# Altium PCB PCB1.PcbDoc
Units mil, origin at the board's own origin, x right, y up, seen from the top; angles counter-clockwise.
Board outline 3085 x 2635 mil, 2 copper layers (Top Layer, Bottom Layer); 70 components, 61 nets, 265 pads, 79 vias.
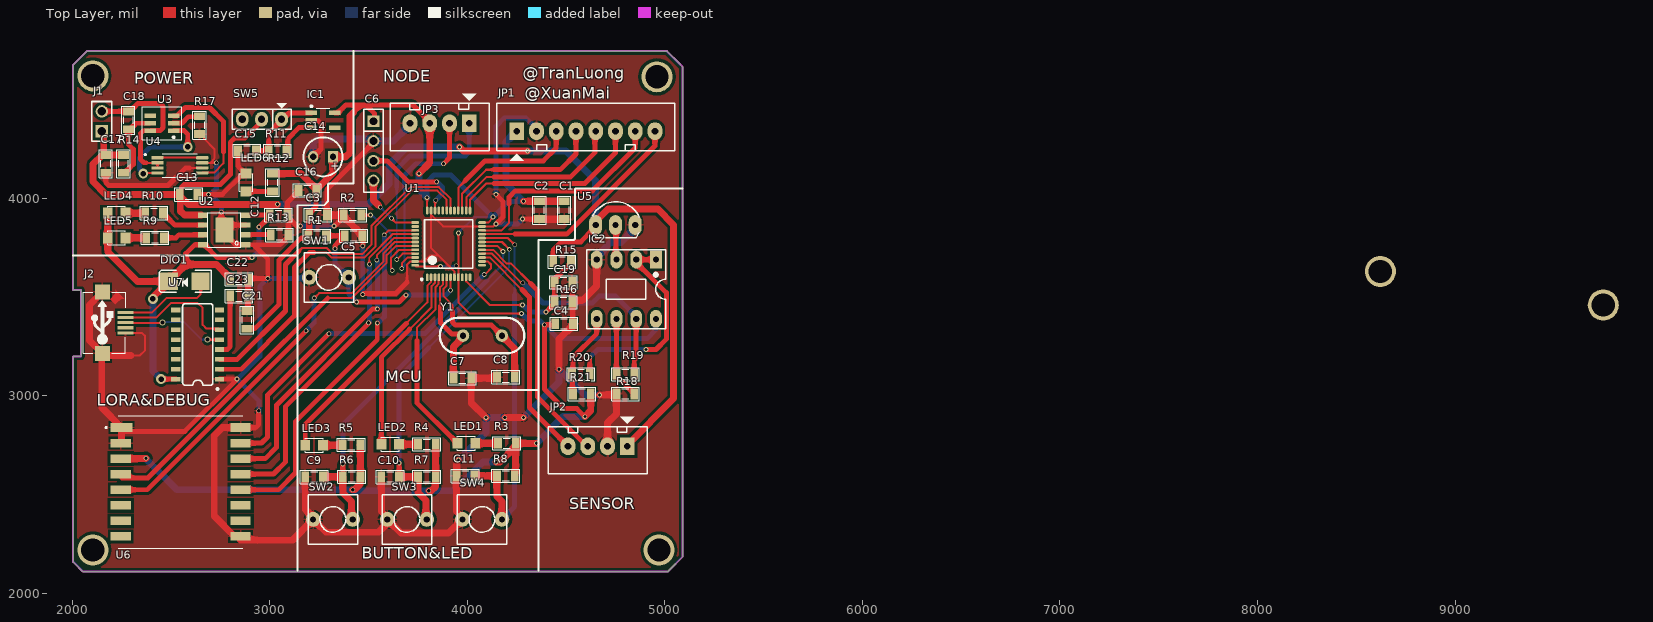
[diagram p0: Top Layer view]
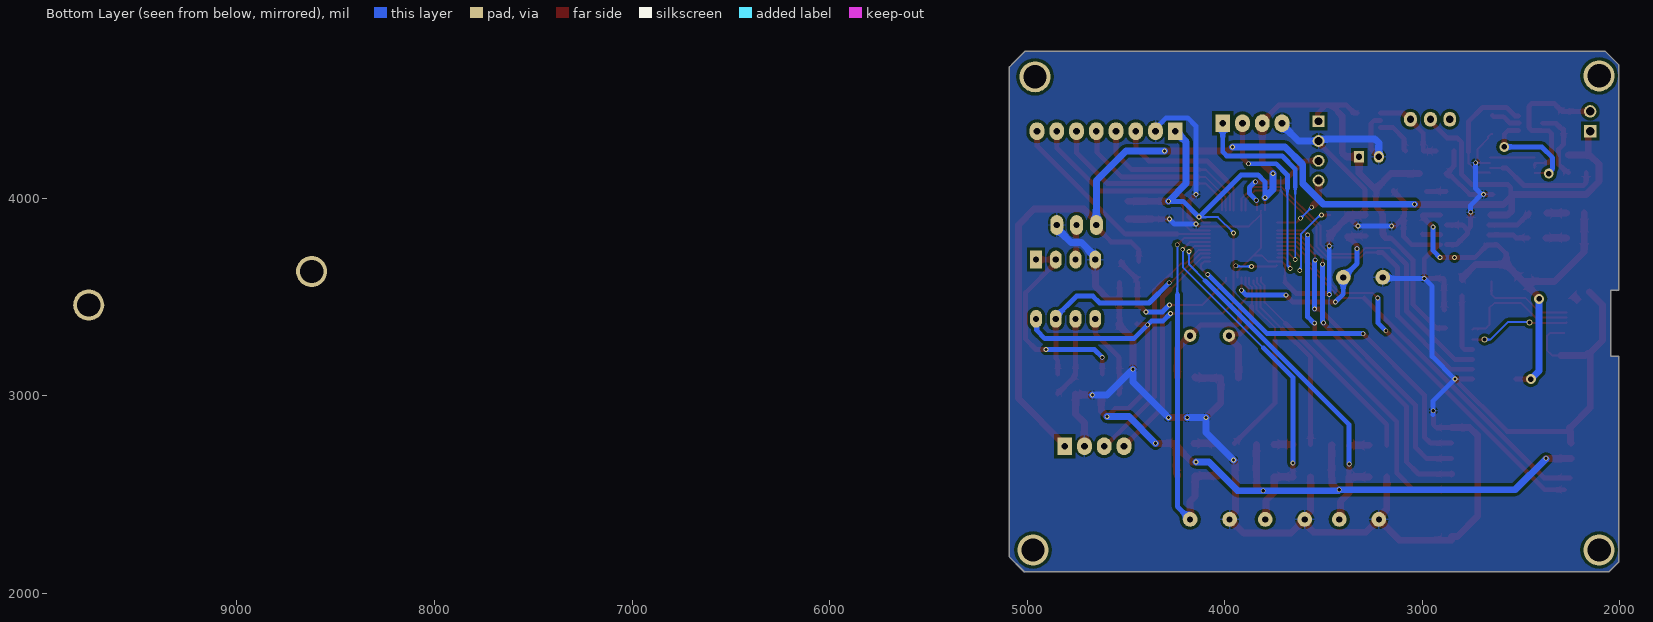
[diagram p1: Bottom Layer view, seen from below]
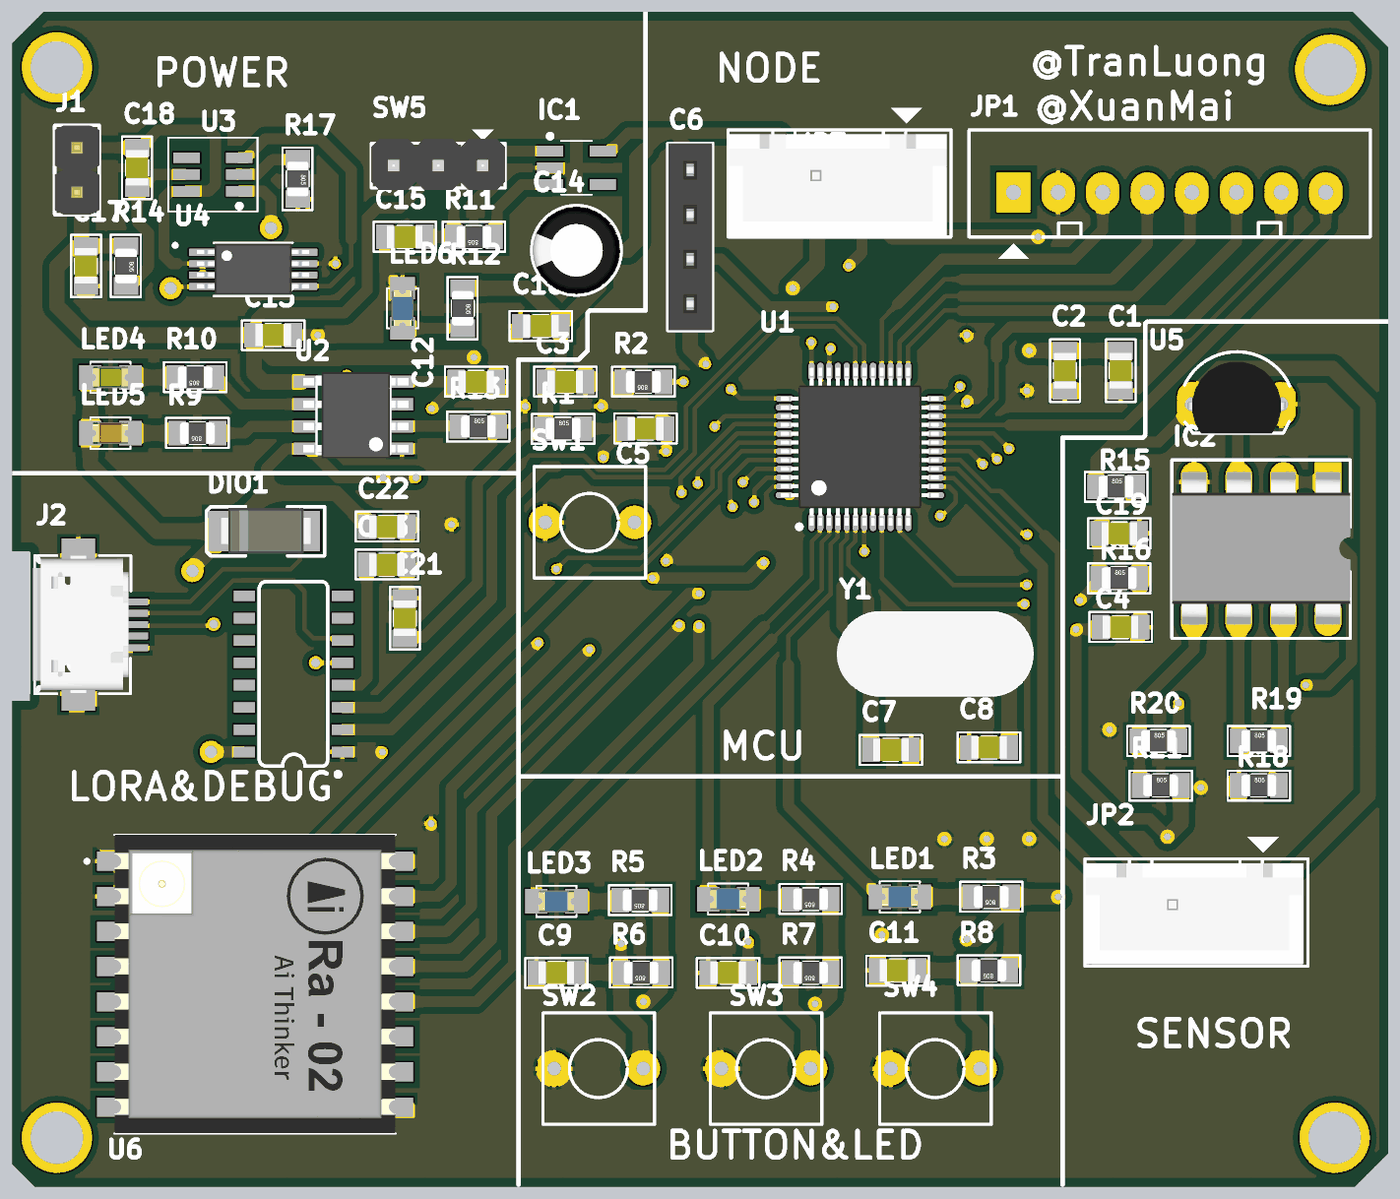
[diagram p2: 3D render of the assembled board from above, using the file's embedded part models]

## Layer stack, top to bottom
Top Solder: solder mask 0.4, Solder Resist, Dk 3.5
Top Layer: signal copper 1.4
Dielectric 1: dielectric 12.6, FR-4, Dk 4.8
Bottom Layer: signal copper 1.4
Bottom Solder: solder mask 0.4, Solder Resist, Dk 3.5

## Board outline
2005,2160 2005,3200 2045,3200 2045,3535 2005,3535 2005,4675 2075,4745 5010,4745 5070,4685 5090,4665 5090,2185 5025,2120 5015,2110 2055,2110

## Design rules (kind name [scope] priority, off if disabled: settings)
Clearance [All] p1: gap=15 ignorepadtopadclearanceinfootprint=FALSE except(0: Arc-Hole Track-Hole SMDPad-Hole THPad-Hole Via-Hole Fill-Hole Poly-Hole Region-Hole Text-Hole; 7: Arc-Arc Arc-Track Arc-SMDPad Track-Track Track-SMDPad SMDPad-SMDPad; 10: Arc-THPad Arc-Via Arc-Text Track-THPad Track-Via Track-Text SMDPad-THPad SMDPad-Via SMDPad-Text THPad-THPad THPad-Via THPad-Text Via-Via Via-Text Fill-Text Poly-Text Region-Text Text-Text)
PolygonConnect [All] p1: connectstyle=Relief reliefconductorwidth=10 reliefentries=4 polygonreliefangle="90 Angle" airgapwidth=10
RoutingVias RoutingVias_1 [All] p1: holewidth=16 width=24 viastyle="Through Hole" minholewidth=16 minwidth=24 maxholewidth=20 maxwidth=28
SolderMaskExpansion [All] p1: expansion=4 istentingtop=FALSE
Width [All] p1: maxlimit=35 minlimit=10 preferedwidth=25
30 further rules are at their usual default settings.

## Classes and differential pairs
component class SENSOR: IC2 JP2 R18 R19 R20 R21 U5
component class POWER: C12 C13 C14 C15 C16 C17 C18 C19 IC1 J1 LED4 LED5 LED6 R9 R10 R11 R12 R13 R14 R15 R16 R17 U2 U3 U4
component class MCU: C1 C2 C3 C4 C5 C6 C7 C8 C9 C10 C11 JP1 LED1 LED2 LED3 R1 R2 R3 R4 R5 R6 R7 R8 SW1 SW2 SW3 SW4 U1 Y1
component class LORA: C21 C22 C23 DIO1 J2 U6 U7
component class LCD: JP3

## Components (designator, comment, footprint, x,y, rotation, side; value= is the part's Value field where it differs from the comment)
C1 "100nF" CAP_0805 4490,3940 r90 top value=33p
C2 "100nF" CAP_0805 4365,3940 r90 top value=33p
C3 "100nF" CAP_0805 3245,3915 r180 top value=33p
C4 "100nF" CAP_0805 4490,3365 r180 top value=33p
C5 "10uF" CAP_0805 3425,3810 r180 top value=33p
C6 "JP4" JP4-C1T 3525,4390 r270 top
C7 "33pF" CAP_0805 3975,3090 r0 top value=33p
C8 "33pF" CAP_0805 4195,3095 r180 top value=33p
C9 "10uF" CAP_0805 3225,2590 r0 top value=33p
C10 "10uF" CAP_0805 3610,2590 r0 top value=33p
C11 "10uF" CAP_0805 3990,2595 r0 top value=33p
C12 "100nF" CAP_0805 3045,3915 r180 top value=33p
C13 "104" CAP_0805 2590,4020 r0 top value=33p
C14 "220uF" c5mm 3270,4210 r180 top
C15 "470nF" CAP_0805 2885,4240 r180 top value=33p
C16 "100nF" CAP_0805 3190,4040 r180 top value=33p
C17 "10uF" CAP_0805 2170,4175 r90 top value=33p
C18 "0.1uF" CAP_0805 2285,4395 r270 top value=33p
C19 "100nF" CAP_0805 4487,3575 r180 top value=33p
C21 "10uF" CAP_0805 2885,3385 r90 top value=33p
C22 "10uF" CAP_0805 2845,3590 r180 top value=33p
C23 "100nF" CAP_0805 2845,3505 r180 top value=33p
DIO1 "Diode SMD" DIO-SMD-106 2570,3580 r0 top value=1N5007
IC1 "RT9013" SOT23-5 3270,4395 r0 top
IC2 "LM358" DIP8/W0.3 4955,3690 r180 top
J1 "JP2" JP2-D1T 2150,4340 r90 top
J2 "USB-5" USB-M1 2270,3370.59 r90 top
JP1 "JP8" CON8 4250,4340 r0 top value="Connector 8"
JP2 "JP4" CON4 4810,2745 r180 top value="Connector 4"
JP3 "JP4" CON4 4010,4380 r180 top value="Connector 4"
LED1 "LED" LED-0805-Blue 4040,2760 r180 top value="LED 3 ly Single Colour"
LED2 "LED" LED-0805-Blue 3655,2755 r180 top value="LED 3 ly Single Colour"
LED3 "LED" LED-0805-Blue 3270,2750 r180 top value="LED 3 ly Single Colour"
LED4 "LED" LED-0805-Green 2180,3925 r0 top value="LED 3 ly Single Colour"
LED5 "LED" LED-0805-Red 2180,3800 r0 top value="LED 3 ly Single Colour"
LED6 "LED" LED-0805-Blue 2880,4035 r90 top value="LED 3 ly Single Colour"
R1 "10K" RES-SMD-0805 3240,3810 r0 top
R2 "100K" RES_SMD_0805 3420,3915 r180 top
R3 "1K" RES_SMD_0805 4200,2760 r180 top
R4 "1K" RES_SMD_0805 3795,2755 r180 top
R5 "1K" RES_SMD_0805 3412.82,2752.5 r180 top
R6 "10K" RES-SMD-0805 3415,2590 r180 top
R7 "10K" RES-SMD-0805 3795,2590 r180 top
R8 "10K" RES-SMD-0805 4195,2595 r180 top
R9 "1k" RES_SMD_0805 2420,3800 r180 top
R10 "1k" RES_SMD_0805 2415,3925 r180 top
R11 "10k" RES_SMD_0805 3040,4240 r180 top
R12 "1K" RES-SMD-0805 3015,4080 r270 top
R13 "1.2k" RES_SMD_0805 3050,3815 r0 top
R14 "100" RES_SMD_0805 2260,4175 r270 top
R15 "30k" RES_SMD_0805 4480,3680 r0 top
R16 "100k" RES_SMD_0805 4487,3475 r0 top
R17 "1K" RES_SMD_0805 2645,4370 r270 top
R18 "Resistor - SMD" RES_SMD_0805 4800,3010 r0 top
R19 "Resistor - SMD" RES_SMD_0805 4800,3110 r0 top
R20 "Resistor - SMD" RES_SMD_0805 4575,3110 r0 top
R21 "Resistor - SMD" RES_SMD_0805 4580,3010 r0 top
SW1 "SW" SW2 3200,3600 r0 top value="SW chip 2 pin"
SW2 "SW" SW2 3220,2375 r0 top value="SW chip 2 pin"
SW3 "SW" SW2 3595,2375 r0 top value="SW chip 2 pin"
SW4 "SW" SW2 3975,2375 r0 top value="SW chip 2 pin"
SW5 "SW3" JP3 2960,4400 r180 top
U1 "STM32" "LQFP 48" 3905.47,3769.13 r90 top
U2 "TP4056" TP4056 2770,3840 r180 top
U3 "DW01A" SOT23-6 2455,4380 r180 top
U4 "FS8205A" FS8205A 2545,4165 r0 top
U5 "LM35" QTO-92 4750,3865 r0 top
U6 "Ra-02 LoRa" Ra-02 2549.27,2564.41 r0 top
U7 "CH340C" SOP-16 2635.24,3260 r90 top
Y1 "8Mhz" XTAL 4075,3305 r180 top

## Footprints (in the part's own frame and the unit in brackets; to place one, negate y for a bottom-side part, rotate by r counter-clockwise, add the part's x,y. Pads: shape width x height; smd on the part's side, far side on the other; paste and mask are expansions set on the pad)
c5mm [mm]
  rect 1.3x1.5 hole 0.8: 1(-1.27,0)
  oval 1.3x1.5 hole 0.8: 2(1.27,0)
  silkscreen extent -2.51,-2.51 2.51,2.51, body extent -2.5,-2.5 2.49,2.5, height 11.01
CAP_0805 [mil]
  rect 39.37x55 smd: 1(-45,0) 2(45,0)
  silkscreen extent -70,-34 70,33, body extent -40,-25 40,25, height 24
CON4 [mil] "CON4"
  rect 75x90 hole 34: 1(0,0)
  oval 75x90 hole 34: 2(100,0) 3(200,0) 4(300,0)
  silkscreen extent -100,-150 400,140, body extent -90,-90 398,136, height 276
CON8 [mil] "CON8"
  rect 75x90 hole 34: 1(0,0)
  oval 75x90 hole 34: 2(100,0) 3(200,0) 4(300,0) 5(400,0) 6(500,0) 7(600,0) 8(700,0)
  silkscreen extent -100,-150 800,140
DIO-SMD-106 [mil]
  rect 90x90.55 smd: 1(80,0) 2(-80,0)
  silkscreen extent -130,-55 135,55, body extent -99,-50 106,52, height 95
DIP8/W0.3 [mil] "8 PIN, W 300mil, Pin to pin 100mil"
  rect 60x90 hole 31: 1(0,0)
  oval 60x90 hole 31: 2(100,0) 3(200,0) 4(300,0) 5(300,300) 6(200,300) 7(100,300) 8(0,300)
  silkscreen extent -50,-50 350,350, body extent -50,-40 350,336, height 201
FS8205A [mm]
  rrect25% 1.56x0.4 smd: 1(-2.88,1.031) 2(-2.88,0.381) 3(-2.88,-0.269) 4(-2.88,-0.919) 5(2.88,-0.919) 6(2.88,-0.269) 7(2.88,0.381) 8(2.88,1.031)
  silkscreen extent -4.54,-1.46 2.25,1.57, body extent -3.2,-1.4 3.2,1.53, height 1.2
JP2-D1T [mm] "2 pins, 1 row, straight, gold plating"
  rect 1.6x1.6 hole 1.1: 1(0,0)
  round 1.6 hole 1.1: 2(2.54,0)
  silkscreen extent -1.27,-1.27 3.81,1.27, body extent -1.27,-1.27 3.81,1.27, height 8.54
JP3 [mil] "Jumper 3"
  oval 65x75 hole 36: 1(-100,0) 2(1,0) 3(99,0)
  silkscreen extent -150,-81 150,50, body extent -150,-60 150,55, height 355
JP4-C1T [mm] "4 row, straight, gold plating"
  rect 1.52x1.52 hole 1.02: 1(0,0)
  round 1.52 hole 1.02: 2(2.54,0) 3(5.08,0) 4(7.62,0)
  silkscreen extent -1.52,-1.27 9.14,1.27, body extent -1.52,-1.25 9.14,1.25, height 8.51
LED-0805-Blue [mil]
  rect 50x55 smd: 1(0,0) 2(90,0)
  silkscreen extent 0,-35 90,35, body extent 5,-25 85,25, height 43
LED-0805-Green [mil]
  rect 50x55 smd: 1(0,0) 2(90,0)
  silkscreen extent 0,-35 90,35, body extent 5,-25 85,25, height 43
LED-0805-Red [mil]
  rect 50x55 smd: 1(0,0) 2(90,0)
  silkscreen extent 0,-35 90,35, body extent 5,-25 85,25, height 43
"LQFP 48" [mm] "LQFP, 48-Leads, Body 7,00x7,00mm, Pitch 0,50mm, IPC Medium Density"
  oval 1x0.35 smd: 1(-4.296,2.75) 2(-4.296,2.25) 3(-4.296,1.75) 4(-4.296,1.25) 5(-4.296,0.75) 6(-4.296,0.25) 7(-4.296,-0.25) 8(-4.296,-0.75) 9(-4.296,-1.25) 10(-4.296,-1.75) 11(-4.296,-2.25) 12(-4.296,-2.75) 25(4.296,-2.75) 26(4.296,-2.25) 27(4.296,-1.75) 28(4.296,-1.25) 29(4.296,-0.75) 30(4.296,-0.25) 31(4.296,0.25) 32(4.296,0.75) 33(4.296,1.25) 34(4.296,1.75) 35(4.296,2.25) 36(4.296,2.75)
  oval 0.35x1 smd: 13(-2.75,-4.296) 14(-2.25,-4.296) 15(-1.75,-4.296) 16(-1.25,-4.296) 17(-0.75,-4.296) 18(-0.25,-4.296) 19(0.25,-4.296) 20(0.75,-4.296) 21(1.25,-4.296) 22(1.75,-4.296) 23(2.25,-4.296) 24(2.75,-4.296) 37(2.75,4.296) 38(2.25,4.296) 39(1.75,4.296) 40(1.25,4.296) 41(0.75,4.296) 42(0.25,4.296) 43(-0.25,4.296) 44(-0.75,4.296) 45(-1.25,4.296) 46(-1.75,4.296) 47(-2.25,4.296) 48(-2.75,4.296)
  silkscreen extent -4.67,-3.1 3.1,3.57, body extent -4.5,-4.5 4.5,4.5, height 1.6
QTO-92 [mil] "TO-92"
  oval 66x100 hole 32: 1(-100,0) 2(0,0) 3(100,0)
  silkscreen extent -117,-65 120,118, body extent -109,-66 109,95, height 245
Ra-02 [mm]
  rect 2.8x1.1 smd: 1(-7.6,7)
  rect 2.6x1.1 smd: 2(-7.7,5) 3(-7.7,3) 4(-7.7,1) 5(-7.7,-1) 6(-7.7,-3) 7(-7.7,-5) 8(-7.7,-7) 9(7.7,-7) 10(7.7,-5) 11(7.7,-3) 12(7.7,-1) 13(7.7,1) 14(7.7,3) 15(7.7,5) 16(7.7,7)
  silkscreen extent -9.68,-8.5 8,8.5, body extent -8,-8.49 8,8.51, height 3.03
RES-SMD-0805 [mil]
  rect 39.37x55 smd: 1(-45,0) 2(45,0)
  silkscreen extent -70,-34 70,33, body extent -39,-25 39,25, height 31
RES_SMD_0805 [mil]
  rect 39.37x55 smd: 1(-45,0) 2(45,0)
  silkscreen extent -70,-34 70,33, body extent -39,-25 39,25, height 31
SOP-16 [mm]
  rect 0.6x1.2 smd: 1(-4.445,-2.8) 2(-3.175,-2.8) 3(-1.905,-2.8) 4(-0.635,-2.8) 5(0.635,-2.8) 6(1.905,-2.8) 7(3.175,-2.8) 8(4.445,-2.8) 9(4.445,2.8) 10(3.175,2.8) 11(1.905,2.8) 12(0.635,2.8) 13(-0.635,2.8) 14(-1.905,2.8) 15(-3.175,2.8) 16(-4.445,2.8)
  silkscreen extent -5.84,-2.67 5.26,1.95, body extent -4.95,-3.47 4.95,3.47, height 1.75
SOT23-5 [mm] "SOT23, 5-Leads, Body 3.0x3.0mm (max), Pitch 0.95mm, IPC Medium Density"
  rect 1.5x0.6 smd: 1(-1.5,0.95) 2(-1.5,0) 3(-1.5,-0.95) 4(1.5,-0.95) 5(1.5,0.95)
  silkscreen extent -1.62,-1.52 0.87,1.92, body extent -1.75,-1.52 1.75,1.53, height 1.45
SOT23-6 [mm] "SOT23, 5-Leads, Body 3.0x3.0mm (max), Pitch 0.95mm, IPC Medium Density"
  rect 1.5x0.6 smd: 1(-1.5,0.95) 2(-1.5,0) 3(-1.5,-0.95) 4(1.5,-0.95) 5(1.5,0) 6(1.5,0.95)
  silkscreen extent -2.54,-2.11 2.54,2.11, body extent -1.75,-1.52 1.75,1.53, height 1.45
SW2 [mil] "SW button 2pin, 250x 250 mil"
  round 75 hole 31: 1(0,0) 2(200,0)
  silkscreen extent -25,-125 225,125
TP4056 [mm]
  rect 1.3x0.7 smd: 1(-2.75,1.905) 2(-2.75,0.635) 3(-2.75,-0.635) 4(-2.75,-1.905) 5(2.75,-1.905) 6(2.75,-0.635) 7(2.75,0.635) 8(2.75,1.905)
  rect 2.3x3.2 smd: 3(-0.025,0)
  silkscreen extent -2.1,-2.2 2.1,2.2, body extent -3.13,-2.45 2.87,2.45, height 1.75
USB-M1 [mm]
  rect 0.4x2 smd: 1(1.3,0) 2(0.65,0) 3(0,0) 4(-0.65,0) 5(-1.321,0)
  rect 1.9x1.9 smd: 5(-3.95,2.968) 5(3.95,2.968)
  silkscreen extent -3.94,-0.03 3.94,5.46, body extent -3.98,0.11 4,5.54, height 2.71
XTAL [mm]
  round 1.6 hole 0.8: 1(-2.552,0.001) 2(2.448,0.001)
  silkscreen extent -5.44,-2.29 5.44,2.29, body extent -5.55,-2.32 5.62,2.35, height 3.63

## Part data
C1 C2 C3 C4 C5 C7 C8 C9 C10 C11 C12 C13 C15 C16 C17 C18 C19 C21 C22 C23: library part CapSMD, "Capacitor", LatestRevisionDate=17-Jul-2002, LatestRevisionNote="Re-released for DXP Platform.", PackageReference=RAD-0.3, Published=8-Jun-2000, Publisher="Altium Limited"
C6: "WR-PHD 2.54 mm Angled Socket Header", Manufacturer="W¨¹rth Elektronik eiSos GmbH", partNo=613004143121, ComponentLink1 Description=Manufacturer, ComponentLink1URL=http://www.we-online.com, ComponentLink2 Description=Datasheet, ComponentLink2URL=http://katalog.we-online.de/em/datasheet/6130xx143121.pdf, Created by="Karrer Zheng", Created Date="29 March 2013", NoPins=04
C14: library part "Cap Pol", "Polarized Capacitor (Axial)", LatestRevisionDate=17-Jul-2002, LatestRevisionNote="Re-released for DXP Platform.", PackageReference=POLAR0.8, Published=8-Jun-2000, Publisher="Altium Limited"
DIO1: "Default Diode", Code - JEDEC=DO-214-AB, Published=8-Jun-2000, Publisher="Altium Limited", Revision="July-2002: Re-released for DXP Platform."
IC1: "RT9013-33GB IC REG LINEAR 3.3V 500mA SOT23-5"
IC2: "Low-Power Dual Operational Amplifier"
J1: "WR-PHD 2.54 mm Angled Socket Header", Manufacturer="W¨¹rth Elektronik eiSos GmbH", partNo=613002143121, ComponentLink1 Description=Manufacturer, ComponentLink1URL=http://www.we-online.com, ComponentLink2 Description=Datasheet, ComponentLink2URL=http://katalog.we-online.de/em/datasheet/6130xx143121.pdf, Created by="Karrer Zheng", Created Date="29 March 2013", NoPins=02
J2: Manufacturer=FCI, Manufacturer Part Number=10118193-0001LF, Supplier Part Number 1=609-4616-1-ND, .Checked PCB=RF, .Checked SCH=MM, .Creator=MM, Category="Connectors, Interconnects", ComponentLink1Description=http://portal.fciconnect.com/Comergent//fci/drawing/10118193.pdf, ComponentLink1URL=http://portal.fciconnect.com/Comergent//fci/drawing/10118193.pdf, Connector Type="USB - micro B", Features="Shielded, Solder Retention", Gender=Receptacle, Ingress Protection=-, Mounting Type="Surface Mount, Right Angle, Horizontal", Number of Contacts=5, Packaging="Cut Tape (CT)", Pricing 1="1=0.46, 10=0.433, 25=0.3712, 50=0.3156, 100=0.3032, 250=0.27224, 500=0.25988 (USD)", RoHS="RoHS Compliant", Specifications="USB 2.0", Stock 1=28642, Supplier 1=Digi-Key
JP1: library part Con8, "Connector 8"
JP2 JP3: library part Con4, "Connector 4"
LED1 LED2 LED3 LED4 LED5 LED6: "LED Single colour Green and Red"
R1 R2 R3 R4 R5 R6 R7 R8 R9 R10 R12 R13 R14 R17: library part "Resistor - SMD", "Resistor SMD", Manufacturer="Generic Components", Class=Passive, Published=08/06/2000, Publisher="Altium Hobart Technology Centre"
R11 R15 R16: library part "Resistor - SMD", "Resistor", Manufacturer="Generic Components", Class=Passive, Published=08/06/2000, Publisher="Altium Hobart Technology Centre"
R18 R19 R20 R21: "Resistor SMD", Manufacturer="Generic Components", Class=Passive, Published=08/06/2000, Publisher="Altium Hobart Technology Centre"
SW1 SW2 SW3 SW4: library part SW2, "Switch button 2 pin"
U1: library part STM32F103C8T6, "STM32 ARM-based 32-bit MCU with 64 Kbytes Flash, 64-pin LQFP, Industrial Temperature"
U2: "Complete single cell Li-Ion battery with a constant current / constant voltage linear charger"
U3: "One Cell Lithium-ion/Polymer Battery Protection IC"
U5: "Teminal"
U6: "LoRa Module Ra-02"
U7: "USB to serial chip CH340", Package=Package, Availability=Unavailable, Check_prices=https://www.snapeda.com/parts/CH340C/WCH/view-part/5428851/?ref=eda, MF=WCH, MP=CH340C, Price=None, SnapEDA_Link=https://www.snapeda.com/parts/CH340C/WCH/view-part/5428851/?ref=snap
Y1: library part XTAL, "Crystal Oscillator", LatestRevisionDate=17-Jul-2002, LatestRevisionNote="Re-released for DXP Platform.", PackageReference=R38, Published=8-Jun-2000, Publisher="Altium Limited"

## Free pads (board coordinates)
  round 157.48 hole 118.11: 0(8621.38,3630) 0(9750,3460) 2(2105,2220) 2(2105,4620) 2(4960,4615) 2(4970,2220)

## Via types
v1: diameter 24, hole 16, Top Layer to Bottom Layer, 73 vias
v2: diameter 50, hole 28, Top Layer to Bottom Layer, 4 vias
v3: diameter 30, hole 20, Top Layer to Bottom Layer, 2 vias

## Nets (pads, with @x,y where several pads share a name; then routed paths per layer and width w, separated by ;. In a path a pad name is that pad's centre, name@x,y a point inside that pad or via, vN(x,y) a via of type N, cw(c..) or ccw(c..) an arc to the next point about the centre after c; other vN are vias at no path point)
3V3: C1.2 C2.2 C3.2 C4.2 C6.1 C14.1 C16.1 C21.1 IC1.5 IC2.8 JP1.1 JP3.3 R1.1 R3.1 R4.1 R5.1 R6.1 R7.1 R8.1 R12.1 R21.2 U1.9 U1.24 U1.36 U1.48 U6.3 | length 10203.8
  Top Layer w10: U1.48 3742.2,3655 v1(3865,3655) ; v1(3796.48,4003.52) 3796.48,3938.99 U1.36 ; v1(3955,3825) 3954.69,3824.69 U1.9 3955,3599.69 3955,3475 4013.29,3416.71 v1(4274.5,3416.71) ; U1.24@4074.61,3876.68 4073.88,3876.68 U1.24 4104.98,3877.4 4130,3902.42 v1(4130,3905)
  Top Layer w25: C21.1@2882.61,3342.61 2927.61,3342.61 3048,3463 3048,3688 3157.39,3797.39 3187.81,3797.39 3195,3804.58 R1.1 ; C3.2 3200,3922.81 3235,3957.81 C16.1 ; IC1.5 3345.39,4432.4 3385.49,4472.5 3462.5,4472.5 ; 3425,4435 3462.5,4472.5 ; C6.1 3530,4395 3530,4430 3495,4465 3495,4472.5 ; JP3.3 3810,4387.5 3725,4472.5 3495,4472.5 ; C4.2 4440,3360 v1(4390,3360) 4390,3035 4489.44,2935.56 4554.44,2935.56 v1(4595,2895) ; R21.2@4617.81,2995 R21.2@4625,3002.19 ; 3462.5,4472.5 3495,4472.5
  Top Layer w35: U6.3 2372.38,2682.52 v1(2374.27,2684.41) ; R12.1 3157.81,4125 C16.1@3235,4047.81 ; R1.1 3195,3817.81 3200,3822.82 C3.2 ; C16.1 C16.1@3235,4047.81 ; v1(3420,2525) 3430,2525 3457.81,2552.81 3457.81,2587.81 R6.1 3458.91,2591.09 3458.91,2751.41 R5.1 ; 3425,4435 3405,4415 3405,4230.5 3384.5,4210 C14.1 3320,4127.97 3242.03,4050 3237.19,4050 C16.1@3235,4047.81 ; v1(3755,4125) 3810,4180 JP3.3 ; v1(3805,2520) 3820,2520 3837.82,2537.82 3837.82,2587.81 R7.1 R4.1 ; v1(4145,2665) 4165,2665 4242.81,2742.81 4242.81,2757.81 R3.1 v1(4350,2760) ; R8.1 4240,2602.81 4245,2607.81 R3.1@4245,2752.19 ; v1(4285,3985) C2.2 C1.2 ; v1(4595,2895) 4625,2925 R21.2@4625,3002.19
  Bottom Layer w10: JP3.3 3810,4355 JP3.3@3815,4350 ; v1(3865,3655) 3940,3655 v1(3944.09,3659.09) ; v1(3955,3825) 4035,3905 v1(4130,3905)
  Bottom Layer w25: v1(3796.48,4003.52) 3796.48,4083.77 3830.71,4118 3917,4118 v1(4130,3905) 4210,3985 v1(4285,3985) ; v1(4274.5,3416.71) 4311.2,3380.01 4369.99,3380.01 v1(4390,3360) 4460,3290 4910,3290 4952.27,3332.27 4952.27,3387.27 IC2.8
  Bottom Layer w35: v1@2373.87,2681.13 2530,2525 v1(3420,2525) 3425,2520 v1(3805,2520) 3935,2520 4080,2665 v1(4145,2665) ; v1(3755,4125) 3755,4045 v1(3796.48,4003.52) ; JP1.1 4250,4332.5 4230,4312.5 4222.5,4312.5 4195,4285 4195,4075 v1(4285,3985) ; v1(4350,2760) 4485,2895 v1(4595,2895)
+5: C12.2 C22.2 DIO1.2 LED4.1 LED5.1 U2.4 U2.8 U7.16 | length 2352.5
  Top Layer w25: v2(2450.34,3085.34) 2450.69,3085 U7.16 ; 2574.72,3699.72 2574.72,3719.72 2619.66,3764.66 2661.4,3764.66 U2.8 2673.54,3765 2674.82,3763.72 2674.82,3760.18 2735,3700 v1(2836.73,3700) v1(2910,3700) ; 2906.54,3915 C12.2 3000,3907.19 2947.81,3855 v1(2945,3855)
  Top Layer w35: LED4.1 LED5.1 2180,3730 2330,3580 DIO1.2 ; v2(2409,3491) 2415,3496.99 2415,3504.72 2490,3579.72 DIO1.2 ; 2574.72,3699.72 2574.72,3665 ; C22.2@2797.81,3590 2797.81,3600 2795,3600 2730,3665 2574.72,3665 ; DIO1.2 2490,3580.28 2574.72,3665
  Bottom Layer w25: v1(2910,3700) 2945,3735 v1(2945,3855)
  Bottom Layer w35: v2(2409,3491) 2409,3126.69 v2(2450.34,3085.34)
GND: C1.1 C2.1 C3.1 C4.1 C5.1 C6.2 C7.2 C8.2 C9.1 C10.1 C11.1 C12.1 C13.2 C14.2 C15.2 C16.2 C17.1 C19.1 C21.2 C22.1 C23.1 IC1.2 IC2.4 J2.5 JP1.2 JP2.2 JP3.4 LED6.2 R2.2 R13.2 R16.2 R17.2 R18.1 SW1.1 SW2.1 SW3.1 SW4.1 U1.8 U1.23 U1.35 U1.47 U2.1 U2.3 U4.6 U4.7 U5.3 U6.1 U6.2 U6.9 U6.16 U7.1 | length 16259.4
  Top Layer w10: J2.5@2280,3318 2354.65,3318 2368.16,3304.49 2368.16,3229.49 2343.16,3204.49 2298.16,3204.49 ; 2595,4154.41 U4.6 ; C13.2 2640,4025 C13.2@2645,4020 ; R17.2 2652.81,4325 2667.5,4310.31 2667.5,4302.5 2720.5,4249.5 2720.5,4200 2700.5,4180 ; U4.7 2700.5,4180 ; v1(2730,4180) 2700.5,4180 ; 3695,3575 3695,3665 3710,3680 U1.47@3736.34,3680 ; U1.47 3737.06,3681.27 3756.89,3681.27 3756.96,3681.35 3781.35,3681.35 3810,3710 3855,3710 ; 3816.89,3917.72 3816.89,3748.11 3855,3710 ; U1.35 3817.61,3937.54 3817.61,3917.72 3877.62,3857.72 U1.23 4132.72,3857.72 v1(4145,3870) ; U1.8 3934.28,3600.72 3934.28,3630.72 3855,3710
  Top Layer w25: C17.1 2170,4080 2185,4065 2485,4065 2574.41,4154.41 2595,4154.41 ; U6.1@2250.85,2820.59 2570.59,2820.59 v1(2835,3085) U7.1 ; C13.2@2645,4020 v1(2690,4020) 2760,4020 2852.5,4112.5 2867.5,4112.5 LED6.2 ; v1(2755,3930) 2755,3856 U2.3@2771,3840 ; C15.2 2840,4162.5 LED6.2@2877.5,4125 ; U6.16 2853.01,2839.41 2929.27,2839.41 2944.27,2854.41 v1(2944.27,2924.41) ; U2.1 2876.99,3766.28 2827,3766.28 2771,3822.28 U2.3@2771,3840 ; U2.3@2878.27,3865 2796,3865 U2.3@2771,3840 ; C21.2@2887.81,3435 2890,3437.19 C23.1 C22.1 2895,3595 v1(2990,3595) 2990,3693.35 2919.63,3763.72 ; 2906.54,3765 3052.82,3765 3095,3807.19 R13.2 C12.1@3095,3902.18 ; C16.2 3145,4032.19 3137.81,4025 3135,4025 3090,3980 C12.1 3090,3907.19 C12.1@3095,3902.18 ; v1(3155,3860) 3137.19,3860 C12.1@3095,3902.18 ; IC1.2 3211.63,4394.31 3243.15,4394.31 3259.97,4377.49 3259.97,4249.97 C14.2 ; C3.1 3290,4045.65 3525,4280.65 C6.2 ; v1(3325,3860) 3327.81,3860 3375,3907.19 R2.2 ; C5.1 3472.68,3807.33 3472.68,3760.86 v1(3470.91,3759.09) ; v1(3470.5,3513.27) 3475.63,3518.41 3638.41,3518.41 3695,3575 ; v1(4145,3870) 4180,3905 4180,3985 v1(4145,4020) ; v1(4280,3895) C2.1 ; C19.1 R16.2 4533.5,3473.5 4533.5,3366.5 C4.1
  Top Layer w35: J2.5@2153.16,3526.1 2088.16,3461.1 2088.16,3280.08 2153.16,3215.08 2150,3211.92 2150,2940.06 U6.1 ; J2.5@2163.16,3214.49 2173.16,3204.49 2235,3204.49 2298.16,3204.49 ; U6.2 2250.06,2765.2 U6.1@2250.06,2820.59 ; U6.1@2250.85,2820.59 2255,2824.74 U6.1@2255,2840 ; U6.9 2822.89,2288.82 2719.27,2392.44 2719.27,2799.41 2759.86,2840 U6.16 ; U6.9@2853.15,2269.41 3114.41,2269.41 SW2.1 ; C9.1 3180,2425.83 3220,2385.82 SW2.1 ; C3.1 R2.2 ; R2.2@3375,3907.19 3462.18,3820 3467.82,3820 3470,3817.81 C5.1 ; C10.1 3565,2415.82 SW3.1@3595,2385.82 ; SW3.1@3587.35,2378.17 3587.35,2345.63 3551.72,2310 3285,2310 SW2.1 ; SW3.1 3665,2305 3905,2305 SW4.1 3975,2385.82 3945,2415.83 C11.1 3947.18,2597.19 3947.18,2667.18 v1(3955,2675) ; v1(4095,2890) 4020,2965 C7.2 4147.82,3090 4150,3092.19 C8.2 ; v1(4190,2890) v1(4285,2890) ; C2.1 C1.1 ; v1(4465,3135) 4465,3287.19 4535,3357.19 C4.1 ; R16.2@4533.5,3473.5 4533.5,3484.31 4534.19,3485 4585,3485 4655,3555 IC2.4 ; v1(4670,3005) 4752.82,3005 4755,3007.19 R18.1 ; JP2.2 4710,2864.08 4755,2909.08 R18.1@4755,3002.19
  Bottom Layer w25: v1(2730,4180) 2730,4050 2702.68,4022.68 2692.68,4022.68 v1(2690,4020) 2700,4020 2755,3965 v1(2755,3930) ; 2945,2905 2945,2975 v1(2835,3085) 2950,3200 2950,3555 v1(2990,3595) 3195,3595 SW1.1 ; v1(3155,3860) v1(3325,3860) ; v1(3470.5,3513.27) 3470.91,3513.68 v1(3470.91,3759.09) ; v1(4145,3870) 4255,3870 v1(4280,3895) ; v1(4145,4020) 4145,4365 4187.5,4407.5 4296.82,4407.5 4350,4354.32 JP1.2
  Bottom Layer w35: C14.2 3220,4279.5 3240.5,4300 3508.28,4300 3518.28,4290 C6.2 3627.5,4290 3710,4372.5 JP3.4 ; v1(3955,2675) 4095,2815 v1(4095,2890) v1(4190,2890) ; v1(4285,2890) 4465,3070 v1(4465,3135) 4595,3005 v1(4670,3005) ; IC2.4 4655,3705 4725.93,3775.93 4777.93,3775.93 4850,3848 U5.3
NetC7_1: C7.1 U1.5 Y1.2 | length 611.8
  Top Layer w10: 3865,3455.97 3863,3457.97 3863,3550.23 3875.94,3563.17 U1.5
  Top Layer w25: 3865,3455.97 3865,3370 3922.76,3312.24 3971.34,3312.24 Y1.2
  Top Layer w35: C7.1 3930,3248.78 3978.61,3297.4 Y1.2
NetC8_1: C8.1 U1.6 Y1.1 | length 767.1
  Top Layer w10: U1.6 3895.63,3558.81 3880,3543.18 3880,3505 3925,3460 3925,3425
  Top Layer w25: 3925,3425 3925,3373.61 3939.64,3358.97 4121.47,3358.97 Y1.1
  Top Layer w35: Y1.1 4240,3240.43 C8.1
NetC15_1: C15.1 IC1.1 R11.2 SW5.1 | length 416.3
  Top Layer w25: C15.1 R11.2 2995,4330 3060,4395 SW5.1 3065.82,4400 3098.23,4432.4 IC1.1
NetC18_1: C18.1 J1.2 U3.6 U4.2 U4.3 | length 801.8
  Top Layer w10: 2375,4180 U4.2 U4.3
  Top Layer w25: J1.2@2165,4440 C18.1 2292.81,4440 2332.81,4480 2445.36,4480 2460,4465.36 2460,4357.24 2445.36,4342.6 U3.6 2395.26,4341.91 2359.64,4341.91 2345,4327.26 2345,4198.51 2363.51,4180 2375,4180
NetC18_2: C18.2 R14.2 U3.5 | length 375
  Top Layer w25: R14.2 2267.19,4137.18 2275,4137.18 2310,4172.18 2310,4249 2286.25,4272.75 2286.25,4275.5 2285,4276.75 C18.2 2292.81,4350 2322.81,4380 U3.5@2391.89,4380
NetC19_2: C19.2 R15.2 R16.1 U1.11 | length 796.7
  Top Layer w10: U1.11 3994.06,3580.18 4114.23,3460 v1(4280,3460)
  Top Layer w25: v1(4398.61,3425) 4399.81,3425 4442,3467.19 R16.1 C19.2 4449.19,3582.19 4449.19,3596.37 4525,3672.19 R15.2
  Bottom Layer w25: v1(4280,3460) 4315,3425 v1(4398.61,3425)
NetC23_2: C23.2 U7.4 | length 315.9
  Top Layer w25: U7.4 2785.36,3235 2800,3249.64 C23.2
NetDIO1_1: DIO1.1 J2.1 | length 483.7
  Top Layer w10: J2.1 2270.08,3421.69 2403.34,3421.69 2476.65,3495 2630,3495 2650,3515 DIO1.1
NetIC1_3: IC1.3 R11.1 | length 206.9
  Top Layer w25: R11.1 3092.18,4247.19 3092.18,4302.18 3147.6,4357.6 IC1.3
NetIC2_1: IC2.1 IC2.2 R20.2 | length 1076.5
  Top Layer w25: R20.2 v1(4620,3195) ; v1(4905,3235) 4955,3235 5007.5,3287.5 5007.5,3522.5 4855,3675 IC2.2 IC2.1
  Bottom Layer w25: v1(4620,3195) 4660,3235 v1(4905,3235)
NetIC2_3: IC2.3 U5.2 | length 177.1
  Top Layer w25: U5.2 4752.5,3862.5 4752.5,3692.5 IC2.3
NetIC2_5: IC2.5 R20.1 R21.1 | length 433.8
  Top Layer w25: R21.1 4532.5,3012.5 4532.5,3107.5 R20.1 4535.11,3115.11 4535.11,3195.11 4655,3315 IC2.5
NetIC2_6: IC2.6 R18.2 R19.1 | length 420.6
  Top Layer w25: IC2.6 R19.1 4755,3102.19 4832.19,3025 4837.82,3025 4845,3017.81 R18.2
NetIC2_7: IC2.7 R19.2 U1.16 | length 1236
  Top Layer w10: U1.16 4125.08,3719.92 4269.86,3575.14 4278.04,3575.14 v1(4280.72,3572.46)
  Top Layer w25: R19.2 4845,3180 4855,3190 IC2.7
  Bottom Layer w25: v1(4280.72,3572.46) 4383.18,3470 4632.68,3470 4667.68,3505 4750,3505 4855,3400 IC2.7
NetJ2_2: J2.2 U7.6 | length 611.8
  Top Layer w10: J2.2 2270.08,3396.1 2426.1,3396.1 2499.72,3469.72 2519.5,3469.72 2519.77,3470 2635,3470 2660,3445 2660,3360 2680,3340 2740.47,3340 U7.6
NetJ2_3: J2.3 U7.5 | length 517.1
  Top Layer w10: J2.3 2272.24,3368.35 2453.35,3368.35 v3(2456.67,3371.67) ; v3(2685,3285) U7.5
  Bottom Layer w10: v3@2456.5,3370.51 2460.33,3374.34 2471.7,3374.34 2472.36,3375 2565,3375 2655,3285 v3(2685,3285)
NetJP2_3: JP2.3 U1.17 | length 1264.5
  Top Layer w10: U1.17 4130.39,3739.61 4200,3670 4221.37,3670 4320,3571.37 4320,3570
  Top Layer w25: 4320,3570 4355,3535 4355,2995 4605,2745 JP2.3
NetJP2_4: JP2.4 U1.15 | length 1159.1
  Top Layer w10: U1.15 4075.33,3699.51 4115.49,3699.51 4276.82,3538.18
  Top Layer w25: 4276.82,3538.18 4315,3500 4315,2940 JP2.4
NetJP3_1: JP3.1 U1.45 | length 1105.4
  Top Layer w10: v1(3643,3690) 3672.92,3719.92 U1.45@3730,3719.92
  Bottom Layer w10: v1(3643,3690) 3643,4058
  Bottom Layer w25: 3643,4058 3643,4148 3710,4215 3990,4215 4010,4235 JP3.1
NetJP3_2: JP3.2 U1.46 | length 1023.8
  Top Layer w10: v1(3668,3645) 3668.82,3645.82 3668.82,3672 3697.05,3700.24 U1.46
  Top Layer w25: v1(3880,4175) 3910,4205 JP3.2
  Bottom Layer w10: v1(3668,3645) 3682.5,3659.5 3682.5,4052.77 ; 3682.5,4117.5 3685,4120
  Bottom Layer w25: 3682.5,4052.77 3682.5,4117.5 ; 3685,4120 3740,4175 v1(3880,4175)
NetLED1_1: LED1.1 R3.2 | length 115
  Top Layer w35: LED1.1 R3.2
NetLED1_2: LED1.2 U1.4 | length 956
  Top Layer w10: 3745,3280 3745,3344.47 3840,3439.47 3840,3551.27 3855.32,3566.59 3855.32,3583.59 U1.4@3855.54,3583.81
  Top Layer w25: 3745,3280 3745,2965 3935,2775 3937.5,2775 3950,2762.5 LED1.2
NetLED2_1: LED2.1 R4.2 | length 95
  Top Layer w35: LED2.1 R4.2
NetLED2_2: LED2.2 U1.3 | length 957.5
  Top Layer w10: 3708,3338 3820,3450 3820,3555.31 3836.57,3571.88 U1.3
  Top Layer w25: LED2.2 3565,3195 3708,3338
NetLED3_1: LED3.1 R5.2 | length 99
  Top Layer w35: LED3.1 3365.63,2750 3367.81,2747.81 R5.2@3367.81,2747.5
NetLED3_2: LED3.2 U1.2 | length 1113.8
  Top Layer w10: 3691.3,3366.55 3797.82,3473.08 3797.82,3557.18 3816.17,3575.52 3816.17,3599.28 U1.2
  Top Layer w25: LED3.2 3180,2855.25 3691.3,3366.55
NetLED4_2: LED4.2 R10.2 | length 100
  Top Layer w35: LED4.2 R10.2
NetLED5_2: LED5.2 R9.2 | length 105
  Top Layer w35: LED5.2 R9.2
NetLED6_1: LED6.1 R12.2 | length 100
  Top Layer w25: LED6.1 2980,4035
NetR2_1: R2.1 U1.44 | length 580.3
  Top Layer w10: R2.1 v1(3510,3915) ; v1(3620,3635) 3617.32,3637.68 3617.32,3645.54 3615,3647.86 3615,3700.18 3654.42,3739.61 U1.44
  Bottom Layer w10: v1(3510,3915) 3518.18,3915 3615,3818.18 3615,3640 v1(3620,3635)
NetR9_1: R9.1 U2.7 | length 202.9
  Top Layer w25: R9.1 2525,3800 2540,3815 U2.7
NetR10_1: R10.1 U2.6 | length 231.2
  Top Layer w25: R10.1 2460,3917.19 2467.19,3910 2475,3910 2520,3865 U2.6
NetR13_1: R13.1 U2.2 | length 95.5
  Top Layer w25: 2906.54,3815 2907.82,3816.28 2996.28,3816.28 R13.1@3000,3820
NetR17_1: R17.1 U3.2 | length 151.6
  Top Layer w25: U3.2@2510,4380 2510.69,4380.69 2555.69,4380.69 2587.81,4412.81 2637.81,4412.81 R17.1@2645,4420
NetU1_14: U1.14 U6.15 | length 1829.6
  Top Layer w10: U1.14 4104.45,3680.55 4120,3665 4120,3645 4096.77,3621.77 4096.16,3621.77 4089.27,3614.87 v1(4085.48,3614.87)
  Top Layer w25: U6.15 2958.52,2761.26 2989.27,2792.01 2989.27,3004.41 v1(3299.27,3314.41)
  Bottom Layer w25: v1@3299.27,3315 3785.61,3315 v1(4085.48,3614.87)
NetU1_30: U1.30 U7.3 | length 1833.6
  Top Layer w10: 3145,3730 3164.5,3749.5 3287.32,3749.5 3318.82,3718 3468,3718 3515,3765 3515,3860 3711.5,4056.5 3855.73,4056.5 3915.32,3996.91 U1.30
  Top Layer w25: U7.3 2835,3185 3080,3430 3080,3665 3145,3730
NetU1_31: U1.31 U7.2 | length 1821.1
  Top Layer w10: 3225,3725 3287.77,3725 3311.77,3701 3481,3701 3535,3755 3535,3855.96 3718.54,4039.5 3848.68,4039.5 3895.63,3992.55 U1.31
  Top Layer w25: U7.2 2855,3135 3125,3405 3125,3650 3200,3725 3225,3725
NetU1_39: U1.39 U6.12 | length 1871.9
  Top Layer w10: v1(3580,3815) 3603.03,3838.03 U1.39
  Top Layer w25: U6.12 3044.9,2525.04 3129.27,2609.41 3129.27,2869.92 3544.32,3284.96 3544.32,3367.6 v1(3544.89,3368.17)
  Bottom Layer w25: v1(3544.89,3368.17) 3548.17,3368.17 3580,3400 v1(3580,3815)
NetU1_40: U1.40 U6.13 | length 1746.5
  Top Layer w10: v1(3505.41,3666.25) 3503.75,3667.91 3503.75,3699.71 3624.04,3820 3714.86,3820 3715.72,3819.14 3720.08,3819.14 3720.15,3819.07 3735.62,3819.07 U1.40
  Top Layer w25: U6.13@2853.05,2604.41 3019.27,2604.41 3079.27,2664.41 3079.27,2945.62 v1@3501.83,3368.17
  Top Layer w35: U6.13 U6.13@2853.05,2604.41
  Bottom Layer w25: v1(3500,3370) 3505,3375 3505,3665.84 v1(3505.41,3666.25)
NetU1_41: U1.41 U6.14 | length 1634.6
  Top Layer w10: v1(3542,3687) 3542,3711.04 3630.42,3799.46 3720.08,3799.46 3720.15,3799.38 3735.62,3799.38 U1.41
  Top Layer w25: U6.14 2977.38,2682.52 3034.27,2739.41 3034.27,2953.06 3521.71,3440.5 v1(3544.89,3440.5)
  Bottom Layer w25: v1(3542,3687) 3544.89,3684.11 v1(3544.89,3440.5)
NetU1_42: U1.42 U6.5 | length 2064.7
  Top Layer w10: v1(3225,3495) 3250,3520 3415,3520 3493.41,3598.41 3575,3680 3575,3720 3633.98,3778.98 U1.42
  Top Layer w25: U6.5@2279.8,2525.04 2379.9,2525.04 v1(3184.27,3329.41)
  Bottom Layer w25: v1@3189.91,3334.91 3225,3370 v1(3225,3495)
NetU1_43: U1.43 U6.4 | length 1994
  Top Layer w10: 3293.79,3495 3414.04,3495 3592.09,3673.05 3592.09,3712.09 3639.29,3759.29 U1.43
  Top Layer w25: U6.4@2251.85,2584.37 2383.16,2584.37 2869.5,3070.71 3293.79,3495
NetU3_1: U3.1 U4.4 | length 572.5
  Top Layer w10: v2(2360,4125) 2363.82,4128.82 U4.4
  Top Layer w25: U3.1 2567.4,4342.6 2585,4325 v2(2585,4260)
  Bottom Layer w25: v2@2360,4130 2340,4150 2340,4205 2395,4260 v2(2585,4260)
  Bottom Layer w35: v2(2360,4125) v2@2360,4130
NetU3_3: U3.3 U4.5 | length 637.3
  Top Layer w10: U4.5 2659.57,4130 2718.18,4130 2765,4176.82 2765,4235
  Top Layer w25: U3.3 2530.39,4417.4 2572.99,4460 2695,4460 2765,4390 2765,4235
NetU4_1: U4.1 U4.8 | length 226.8
  Top Layer w10: U4.1 U4.8
PB0: C9.2 R6.2 SW2.2 U1.18 | length 1930.4
  Top Layer w10: U1.18 4152.08,3759.29 v1(4180.87,3730.49)
  Top Layer w25: R6.2 v1(3370,2655)
  Top Layer w35: C9.2 R6.2 3370,2507.91 3412.91,2465 3412.91,2382.09 SW2.2
  Bottom Layer w10: 4098.77,3582.91 4098.77,3583.09 4180.87,3665.19 v1(4180.87,3730.49)
  Bottom Layer w25: v1(3370,2655) 3370,2854.32 3734.3,3218.61 3734.48,3218.61 4098.77,3582.91
PB1: C10.2 R7.2 SW3.2 U1.19 | length 1865.4
  Top Layer w10: U1.19 4175.72,3778.98 v1(4212.96,3741.73)
  Top Layer w25: C10.2 v1(3655,2660)
  Top Layer w35: C10.2 R7.2 3750,2510 3790,2470 3790,2380 SW3.2
  Bottom Layer w10: 3802.88,3241.77 4210,3648.88 4210,3738.77 v1(4212.96,3741.73)
  Bottom Layer w25: v1(3655,2660) 3655,3094.06 3728.85,3167.91 3729.03,3167.91 3802.88,3241.77
PB2: C11.2 R8.2 SW4.2 U1.20 | length 1941.9
  Top Layer w10: U1.20 4074.94,3799 4206,3799 v1(4240,3765)
  Top Layer w35: C11.2 R8.2 4150,2490 4175,2465 SW4.2
  Bottom Layer w10: 4240,3510 v1(4240,3765)
  Bottom Layer w25: SW4.2 4240,2440 4240,3510
PB10: JP1.8 U1.21 | length 1135.3
  Top Layer w10: U1.21 4241.65,3818.35
  Top Layer w25: 4241.65,3818.35 4503.09,3818.35 4950,4265.25 JP1.8
PB11: JP1.7 U1.22 | length 1109.7
  Top Layer w10: U1.22 4135.65,3838.03 4173.81,3838.03 4212,3876.22 4212,3970
  Top Layer w25: 4212,3970 4212,4007 4243,4038 4633,4038 4850,4255 JP1.7
PB12: JP1.6 U1.25 | length 999.6
  Top Layer w10: U1.25 4013.74,3993.74 4095,4075 4135,4075
  Top Layer w25: 4135,4075 4595,4075 4750,4230 JP1.6
PB13: JP1.5 U1.26 | length 922.4
  Top Layer w10: U1.26 3994.78,3938.99 3994.78,3954.46 3994.85,3954.53 3994.85,4004.85 4097,4107 4135,4107
  Top Layer w25: 4135,4107 4522,4107 4645.72,4230.72 4645.72,4335.72 JP1.5
PB14: JP1.4 U1.27 | length 860.2
  Top Layer w10: U1.27 3974.37,4024.37 4095,4145 4135,4145
  Top Layer w25: 4135,4145 4470.61,4145 4550,4224.39 JP1.4
PB15: JP1.3 U1.28 | length 779.7
  Top Layer w10: U1.28 3954.69,4054.69 3990,4090
  Top Layer w25: 3990,4090 4090,4190 4385,4190 4450,4255 JP1.3
RST: C5.2 R1.2 SW1.2 U1.7 | length 1071.2
  Top Layer w10: v1(3915.32,3534.68) U1.7
  Top Layer w25: R1.2 C5.2 3380,3802.19 3372.82,3795 3365,3795 3330,3760 v1(3330,3745) ; v1(3440,3475) 3655,3475 v1(3690,3510)
  Bottom Layer w25: v1(3330,3745) 3330,3670 SW1.2 ; SW1.2@3400,3605 3400,3515 v1(3440,3475) ; v1(3690,3510) 3890.63,3510 v1(3915.32,3534.68)
SWCLK: C6.4 U1.37 | length 344
  Top Layer w10: v1(3616,3898.77) 3616.23,3898.77 3637.6,3877.4 U1.37
  Top Layer w35: C6.4 3525,3990 3550,3965
  Bottom Layer w10: v1(3560,3955) 3615,3900 3615,3899.77 v1(3616,3898.77)
SWDIO: C6.3 U1.34 | length 538.6
  Top Layer w10: U1.34 3836.57,3986.57 v1(3840,3990)
  Top Layer w25: C6.3 3595,4190 3701.5,4083.5 v1(3845,4083.5)
  Bottom Layer w25: v1(3840,3990) 3875,4025 3875,4055 3846.5,4083.5 v1(3845,4083.5)
VBAT: C13.1 C17.2 J1.1 JP2.1 R14.1 R15.1 SW5.2 U2.5 U5.1 | length 6364.6
  Top Layer w25: C13.1 2552.18,4027.19 2552.18,4055.35 2566.83,4070 2750,4070 2800.82,4120.82 2800.82,4283.03 2822.78,4305 2874.5,4305 2959,4389.5 SW5.2 ; R15.1 4435,3740 4475,3780 4575,3780 4650,3855 U5.1
  Top Layer w35: J1.1 2160,4330 2160,4222.18 2162.19,4220 C17.2 ; R14.1 C17.2 ; U2.5@2653.64,3915 2567.69,3915 2547.18,3935.5 C13.1@2547.18,4010 ; v1(3040,3970) 3039.5,3969.5 2738.64,3969.5 2737.14,3968 2589.18,3968 C13.1@2547.18,4010 ; v1(3960,4260) 3980,4240 v1(4305,4240) ; U5.1 4650,3882 4713,3945 4965,3945 5044.5,3865.5 5044.5,2987 4810,2752.5 JP2.1 ; C17.2 2167.81,4217.81 2150,4217.81 2105,4172.81 2105,4085 2170,4020 2542.81,4020 C13.1 2547.18,4017.81 C13.1@2547.18,4010
  Bottom Layer w35: v1(3040,3970) 3500,3970 3605,4075 3605,4170 3695,4260 v1(3960,4260) ; v1(4305,4240) 4500,4240 4650,4090 U5.1
pads on no net: IC1.4 J2.4 SW5.3 U1.1 U1.10 U1.12 U1.13 U1.29 U1.32 U1.33 U1.38 U3.4 U6.6 U6.7 U6.8 U6.10 U6.11 U7.7 U7.8 U7.9 U7.10 U7.11 U7.12 U7.13 U7.14 U7.15

## Polygon pours and split planes (outlines as drawn)
GND on Top Layer "GND_L01_P000" (solid, remove dead copper, pour order 0): 2075,4745 2005,4675 2005,3535 2045,3535 2045,3200 2005,3200 2005,2160 2055,2110 5015,2110 5090,2185 5090,4665 5010,4745
GND on Bottom Layer "GND_L02_P001" (solid, remove dead copper, pour order 1): 2075,4745 2005,4675 2005,3540 2015,3530 2020,3535 2045,3535 2045,3195 2040,3200 2005,3200 2005,2160 2055,2110 5010,2110 5015,2105 5090,2180 5090,4665 5010,4745

## Keep-outs
Top Layer:
  the board outline again, w10

## Silkscreen, mask and mechanical layers (free items; w line width, h text height)
Top Overlay:
  lines w10: 2005,3710 3140,3710 ; 3140,2115 3140,3710 ; 3140,3030 4355,3030 ; 3425,4745 3425,4075 3300,4075 3295,4070 3295,3985 3275,3965 3140,3965 3140,3710 ; 4360,2115 4360,3790 4540,3790 4545,3795 4545,4045 4550,4050 5090,4050
  text "@TranLuong" at 4280,4604.99 h60
  text "NODE" at 3575,4590 h60
  text "POWER" at 2315,4580 h60
  text "@XuanMai" at 4290,4505 h60
  text "MCU" at 3585,3070 h60
  text "LORA&DEBUG" at 2125,2950 h60
  text "SENSOR" at 4515,2425 h60
  text "BUTTON&LED" at 3465,2175 h60

## Text inside footprints (layer, text, board x,y; h text height)
C14: Top Overlay "+" at 3355,4180 h40 r180